# EAGLE board Qwiic_Shield_RaspberryPi-Panel (EAGLE 7.7.0)
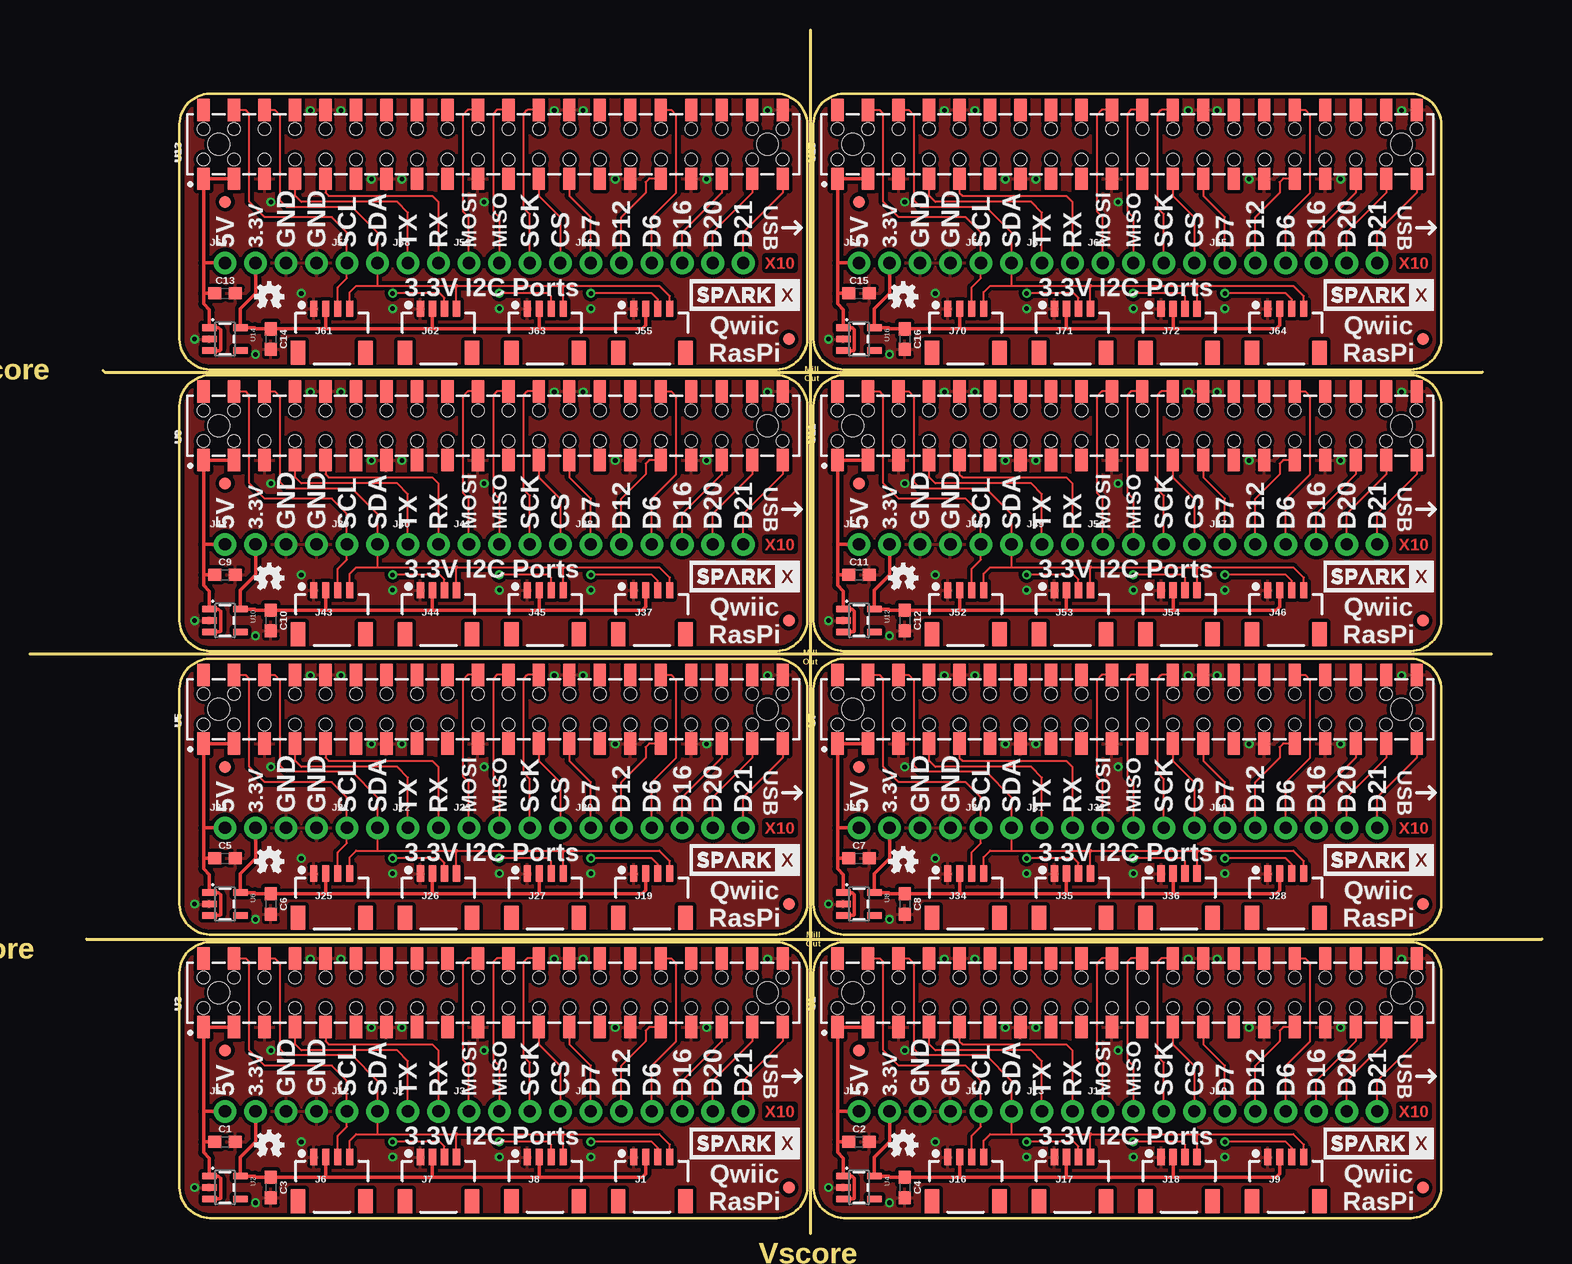
[diagram p0: board, top side]
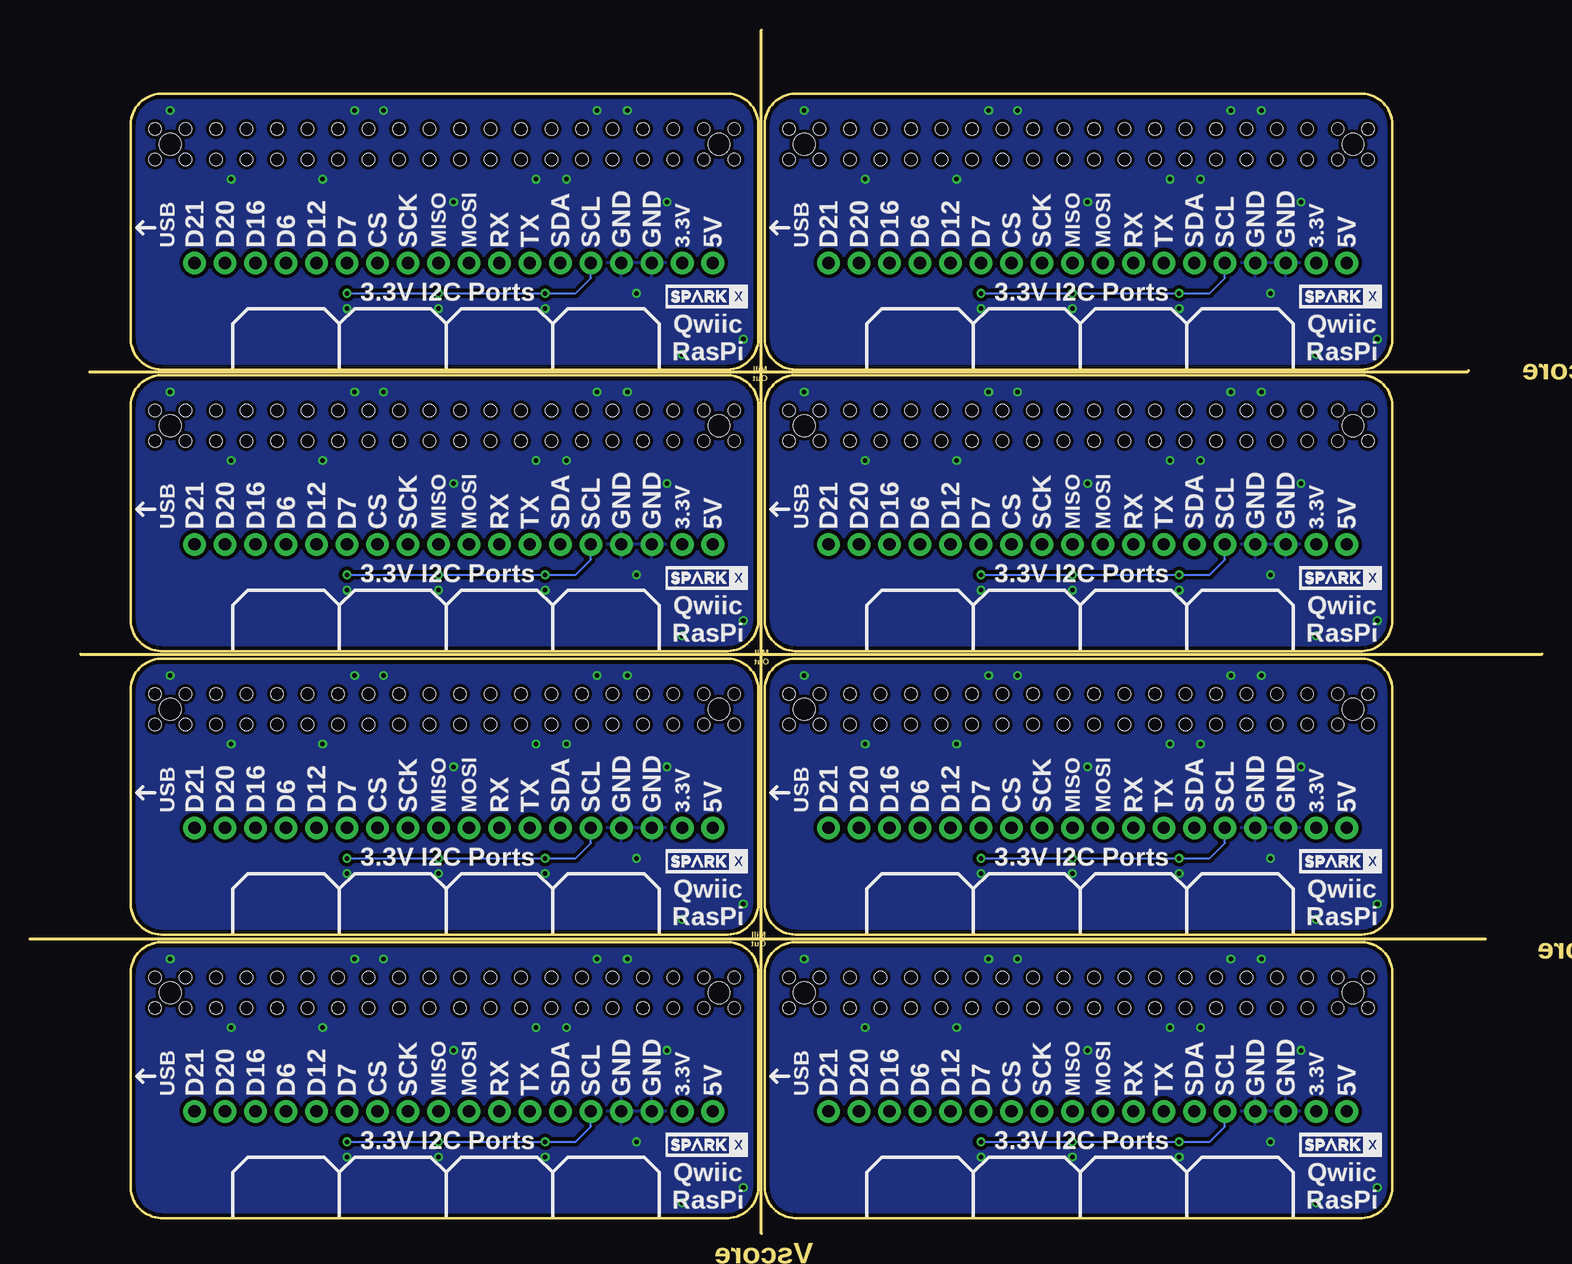
[diagram p1: board, bottom side, seen from below]

Size 125.98 x 100.3 mm. Coordinates in mm from the lower left corner, seen from the top.
Outline: 65.05,0 65.05,100.3
Outline: 6.1,71.91 6.22,71.78 121.03,71.78
Outline: 121.79,48.29 0,48.29
Outline: 4.7,24.54 125.98,24.54
Outline: 12.45,21.75 12.45,3.84 arc87 14.99,1.3 62.23,1.3 arc87 64.77,3.84 64.77,21.75 arc87 62.23,24.29 14.99,24.29 arc87 12.45,21.75
Outline: 65.28,21.75 65.28,3.84 arc87 67.82,1.3 115.06,1.3 arc87 117.6,3.84 117.6,21.75 arc87 115.06,24.29 67.82,24.29 arc87 65.28,21.75
Outline: 12.45,45.37 12.45,27.46 arc87 14.99,24.92 62.23,24.92 arc87 64.77,27.46 64.77,45.37 arc87 62.23,47.91 14.99,47.91 arc87 12.45,45.37
Outline: 65.28,45.37 65.28,27.46 arc87 67.82,24.92 115.06,24.92 arc87 117.6,27.46 117.6,45.37 arc87 115.06,47.91 67.82,47.91 arc87 65.28,45.37
Outline: 12.45,68.99 12.45,51.08 arc87 14.99,48.54 62.23,48.54 arc87 64.77,51.08 64.77,68.99 arc87 62.23,71.53 14.99,71.53 arc87 12.45,68.99
Outline: 65.28,68.99 65.28,51.08 arc87 67.82,48.54 115.06,48.54 arc87 117.6,51.08 117.6,68.99 arc87 115.06,71.53 67.82,71.53 arc87 65.28,68.99
Outline: 12.45,92.45 12.45,74.54 arc87 14.99,72 62.23,72 arc87 64.77,74.54 64.77,92.45 arc87 62.23,94.99 14.99,94.99 arc87 12.45,92.45
Outline: 65.28,92.45 65.28,74.54 arc87 67.82,72 115.06,72 arc87 117.6,74.54 117.6,92.45 arc87 115.06,94.99 67.82,94.99 arc87 65.28,92.45
Copper layers (1*16): Top 0.035mm / dielectric 1.5mm / Bottom 0.035mm
Design rules "SparkFun-2-layer-TIGHT": minimum track width 7mil, minimum drill 15mil, track to track 7mil, track to pad 7mil, pad to pad 7mil, via to via 7mil, smd to smd 7mil, copper to edge 7mil, drill to drill 7mil, minimum pad ring 7mil, minimum via ring 7mil, stop-mask expansion 4mil, vias tented up to drill 25mil, thermal gap 10mil
Net classes: 0 Default: width 0.178 mm; 1 vcc: width 0.178 mm

## Footprints (pad centres in the part's own frame; a part is rotated, then mirrored left to right if it is on the bottom)
0603 = smd 1.1 x 1: 1 -0.85,0; 2 0.85,0
FIDUCIAL-1X2 = smd 1 x 1: 1 0,0
1X04_1MM_RA = smd 0.6 x 1.35: 1 -1.5,0; 2 -0.5,0; 3 0.5,0; 4 1.5,0 | smd 1.2 x 2: NC1 2.8,-3.675; NC2 -2.8,-3.675
1X02_NO_SILK = drill 1.016 pad 1.88: 1 0,0; 2 2.54,0
1X04_NO_SILK = drill 1.016 pad 1.88: 1 0,0; 2 2.54,0; 3 5.08,0; 4 7.62,0
1X06_NO_SILK = drill 1.016 pad 1.88: 1 0,0; 2 2.54,0; 3 5.08,0; 4 7.62,0; 5 10.16,0; 6 12.7,0
RASPBERRY_PI_SHIELD_BOTTOM_ENTRY_NOHOLES = smd 1.02 x 1.87: 1 8.37,7.665; 2 8.37,1.935; 3 10.91,7.665; 4 10.91,1.935; 5 13.45,7.665; 6 13.45,1.935; 7 15.99,7.665; 8 15.99,1.935; 9 18.53,7.665; 10 18.53,1.935; 11 21.07,7.665; 12 21.07,1.935; 13 23.61,7.665; 14 23.61,1.935; 15 26.15,7.665; 16 26.15,1.935; 17 28.69,7.665; 18 28.69,1.935; 19 31.23,7.665; 20 31.23,1.935; 21 33.77,7.665; 22 33.77,1.935; 23 36.31,7.665; 24 36.31,1.935; 25 38.85,7.665; 26 38.85,1.935; 27 41.39,7.665; 28 41.39,1.935; 29 43.93,7.665; 30 43.93,1.935; 31 46.47,7.665; 32 46.47,1.935; 33 49.01,7.665; 34 49.01,1.935; 35 51.55,7.665; 36 51.55,1.935; 37 54.09,7.665; 38 54.09,1.935; 39 56.63,7.665; 40 56.63,1.935 | hole 1.02: 31.23,6.07; 31.23,3.53; 28.69,3.53; 28.69,6.07; 26.15,6.07; 26.15,3.53; 23.61,3.53; 23.61,6.07; 36.31,6.07; 36.31,3.53; 33.77,3.53; 33.77,6.07; 15.99,6.07; 15.99,3.53; 13.45,3.53; 13.45,6.07; 10.91,6.07; 10.91,3.53; 8.37,3.53; 8.37,6.07; 21.07,6.07; 21.07,3.53; 18.53,3.53; 18.53,6.07; 46.47,6.07; 46.47,3.53; 43.93,3.53; 43.93,6.07; 41.39,6.07; 41.39,3.53; 38.85,3.53; 38.85,6.07; 51.55,6.07; 51.55,3.53; 49.01,3.53; 49.01,6.07; 54.09,6.07; 56.63,6.07; 56.63,3.53; 54.09,3.53 | hole 1.8: 55.36,4.8; 9.64,4.8
SOT23-5 = smd 0.55 x 1.2: 1 -0.95,-1.3; 2 0,-1.3; 3 0.95,-1.3; 4 0.95,1.3; 5 -0.95,1.3

## Placement (x,y rotation side)
C1  1.0uF  [0603]  16.26,7.65 0 top
C2  1.0uF  [0603]  69.09,7.65 0 top
C3  1.0uF  [0603]  20.07,3.84 270 top
C4  1.0uF  [0603]  72.9,3.84 270 top
C5  1.0uF  [0603]  16.26,31.27 0 top
C6  1.0uF  [0603]  20.07,27.46 270 top
C7  1.0uF  [0603]  69.09,31.27 0 top
C8  1.0uF  [0603]  72.9,27.46 270 top
C9  1.0uF  [0603]  16.26,54.89 0 top
C10  1.0uF  [0603]  20.07,51.08 270 top
C11  1.0uF  [0603]  69.09,54.89 0 top
C12  1.0uF  [0603]  72.9,51.08 270 top
C13  1.0uF  [0603]  16.26,78.35 0 top
C14  1.0uF  [0603]  20.07,74.54 270 top
C15  1.0uF  [0603]  69.09,78.35 0 top
C16  1.0uF  [0603]  72.9,74.54 270 top
FD1  FIDUCIAL1X2  [FIDUCIAL-1X2]  16.26,15.27 180 top
FD2  FIDUCIAL1X2  [FIDUCIAL-1X2]  63.25,3.84 180 top
FD3  FIDUCIAL1X2  [FIDUCIAL-1X2]  69.09,15.27 180 top
FD4  FIDUCIAL1X2  [FIDUCIAL-1X2]  116.08,3.84 180 top
FD5  FIDUCIAL1X2  [FIDUCIAL-1X2]  16.26,38.89 180 top
FD6  FIDUCIAL1X2  [FIDUCIAL-1X2]  63.25,27.46 180 top
FD7  FIDUCIAL1X2  [FIDUCIAL-1X2]  69.09,38.89 180 top
FD8  FIDUCIAL1X2  [FIDUCIAL-1X2]  116.08,27.46 180 top
FD9  FIDUCIAL1X2  [FIDUCIAL-1X2]  16.26,62.51 180 top
FD10  FIDUCIAL1X2  [FIDUCIAL-1X2]  63.25,51.08 180 top
FD11  FIDUCIAL1X2  [FIDUCIAL-1X2]  69.09,62.51 180 top
FD12  FIDUCIAL1X2  [FIDUCIAL-1X2]  116.08,51.08 180 top
FD13  FIDUCIAL1X2  [FIDUCIAL-1X2]  16.26,85.97 180 top
FD14  FIDUCIAL1X2  [FIDUCIAL-1X2]  63.25,74.54 180 top
FD15  FIDUCIAL1X2  [FIDUCIAL-1X2]  69.09,85.97 180 top
FD16  FIDUCIAL1X2  [FIDUCIAL-1X2]  116.08,74.54 180 top
J1  [1X04_1MM_RA]  51.82,6.38 0 top
J2  [1X02_NO_SILK]  31.5,10.19 0 top
J3  [1X04_NO_SILK]  36.58,10.19 0 top
J4  [1X06_NO_SILK]  46.74,10.19 0 top
J5  [1X04_NO_SILK]  16.26,10.19 0 top
J6  [1X04_1MM_RA]  25.15,6.38 0 top
J7  [1X04_1MM_RA]  34.04,6.38 0 top
J8  [1X04_1MM_RA]  42.93,6.38 0 top
J9  [1X04_1MM_RA]  104.65,6.38 0 top
J10  [1X06_NO_SILK]  99.57,10.19 0 top
J11  [1X02_NO_SILK]  79.25,10.19 0 top
J12  [1X02_NO_SILK]  26.42,10.19 0 top
J13  [1X02_NO_SILK]  84.33,10.19 0 top
J14  [1X04_NO_SILK]  89.41,10.19 0 top
J15  [1X04_NO_SILK]  69.09,10.19 0 top
J16  [1X04_1MM_RA]  77.98,6.38 0 top
J17  [1X04_1MM_RA]  86.87,6.38 0 top
J18  [1X04_1MM_RA]  95.76,6.38 0 top
J19  [1X04_1MM_RA]  51.82,30 0 top
J20  [1X06_NO_SILK]  46.74,33.81 0 top
J21  [1X02_NO_SILK]  26.42,33.81 0 top
J22  [1X02_NO_SILK]  31.5,33.81 0 top
J23  [1X04_NO_SILK]  36.58,33.81 0 top
J24  [1X04_NO_SILK]  16.26,33.81 0 top
J25  [1X04_1MM_RA]  25.15,30 0 top
J26  [1X04_1MM_RA]  34.04,30 0 top
J27  [1X04_1MM_RA]  42.93,30 0 top
J28  [1X04_1MM_RA]  104.65,30 0 top
J29  [1X06_NO_SILK]  99.57,33.81 0 top
J30  [1X02_NO_SILK]  79.25,33.81 0 top
J31  [1X02_NO_SILK]  84.33,33.81 0 top
J32  [1X04_NO_SILK]  89.41,33.81 0 top
J33  [1X04_NO_SILK]  69.09,33.81 0 top
J34  [1X04_1MM_RA]  77.98,30 0 top
J35  [1X04_1MM_RA]  86.87,30 0 top
J36  [1X04_1MM_RA]  95.76,30 0 top
J37  [1X04_1MM_RA]  51.82,53.62 0 top
J38  [1X06_NO_SILK]  46.74,57.43 0 top
J39  [1X02_NO_SILK]  26.42,57.43 0 top
J40  [1X02_NO_SILK]  31.5,57.43 0 top
J41  [1X04_NO_SILK]  36.58,57.43 0 top
J42  [1X04_NO_SILK]  16.26,57.43 0 top
J43  [1X04_1MM_RA]  25.15,53.62 0 top
J44  [1X04_1MM_RA]  34.04,53.62 0 top
J45  [1X04_1MM_RA]  42.93,53.62 0 top
J46  [1X04_1MM_RA]  104.65,53.62 0 top
J47  [1X06_NO_SILK]  99.57,57.43 0 top
J48  [1X02_NO_SILK]  79.25,57.43 0 top
J49  [1X02_NO_SILK]  84.33,57.43 0 top
J50  [1X04_NO_SILK]  89.41,57.43 0 top
J51  [1X04_NO_SILK]  69.09,57.43 0 top
J52  [1X04_1MM_RA]  77.98,53.62 0 top
J53  [1X04_1MM_RA]  86.87,53.62 0 top
J54  [1X04_1MM_RA]  95.76,53.62 0 top
J55  [1X04_1MM_RA]  51.82,77.08 0 top
J56  [1X06_NO_SILK]  46.74,80.89 0 top
J57  [1X02_NO_SILK]  26.42,80.89 0 top
J58  [1X02_NO_SILK]  31.5,80.89 0 top
J59  [1X04_NO_SILK]  36.58,80.89 0 top
J60  [1X04_NO_SILK]  16.26,80.89 0 top
J61  [1X04_1MM_RA]  25.15,77.08 0 top
J62  [1X04_1MM_RA]  34.04,77.08 0 top
J63  [1X04_1MM_RA]  42.93,77.08 0 top
J64  [1X04_1MM_RA]  104.65,77.08 0 top
J65  [1X06_NO_SILK]  99.57,80.89 0 top
J66  [1X02_NO_SILK]  79.25,80.89 0 top
J67  [1X02_NO_SILK]  84.33,80.89 0 top
J68  [1X04_NO_SILK]  89.41,80.89 0 top
J69  [1X04_NO_SILK]  69.09,80.89 0 top
J70  [1X04_1MM_RA]  77.98,77.08 0 top
J71  [1X04_1MM_RA]  86.87,77.08 0 top
J72  [1X04_1MM_RA]  95.76,77.08 0 top
LOGO1  OSHW-LOGOMINI  [OSHW-LOGO-MINI]  19.94,7.4 0 top
LOGO2  OSHW-LOGOMINI  [OSHW-LOGO-MINI]  72.77,7.4 0 top
LOGO3  OSHW-LOGOMINI  [OSHW-LOGO-MINI]  19.94,31.02 0 top
LOGO4  OSHW-LOGOMINI  [OSHW-LOGO-MINI]  72.77,31.02 0 top
LOGO5  OSHW-LOGOMINI  [OSHW-LOGO-MINI]  19.94,54.64 0 top
LOGO6  OSHW-LOGOMINI  [OSHW-LOGO-MINI]  72.77,54.64 0 top
LOGO7  OSHW-LOGOMINI  [OSHW-LOGO-MINI]  19.94,78.1 0 top
LOGO8  OSHW-LOGOMINI  [OSHW-LOGO-MINI]  72.77,78.1 0 top
U1  RASPBERRY_PI  [RASPBERRY_PI_SHIELD_BOTTOM_ENTRY_NOHOLES]  58.93,15.27 0 top
U2  3.3V/600mA  [SOT23-5]  16.26,3.84 270 top
U3  RASPBERRY_PI  [RASPBERRY_PI_SHIELD_BOTTOM_ENTRY_NOHOLES]  6.1,15.27 0 top
U4  3.3V/600mA  [SOT23-5]  69.09,3.84 270 top
U5  RASPBERRY_PI  [RASPBERRY_PI_SHIELD_BOTTOM_ENTRY_NOHOLES]  6.1,38.89 0 top
U6  3.3V/600mA  [SOT23-5]  16.26,27.46 270 top
U7  RASPBERRY_PI  [RASPBERRY_PI_SHIELD_BOTTOM_ENTRY_NOHOLES]  58.93,38.89 0 top
U8  3.3V/600mA  [SOT23-5]  69.09,27.46 270 top
U9  RASPBERRY_PI  [RASPBERRY_PI_SHIELD_BOTTOM_ENTRY_NOHOLES]  6.1,62.51 0 top
U10  3.3V/600mA  [SOT23-5]  16.26,51.08 270 top
U11  RASPBERRY_PI  [RASPBERRY_PI_SHIELD_BOTTOM_ENTRY_NOHOLES]  58.93,62.51 0 top
U12  3.3V/600mA  [SOT23-5]  69.09,51.08 270 top
U13  RASPBERRY_PI  [RASPBERRY_PI_SHIELD_BOTTOM_ENTRY_NOHOLES]  6.1,85.97 0 top
U14  3.3V/600mA  [SOT23-5]  16.26,74.54 270 top
U15  RASPBERRY_PI  [RASPBERRY_PI_SHIELD_BOTTOM_ENTRY_NOHOLES]  58.93,85.97 0 top
U16  3.3V/600mA  [SOT23-5]  69.09,74.54 270 top
U$1  SPARKX-LOGO3  [SPARKX-SMALL]  16.76,7.4 0 bottom
U$2  SPARKX-LOGO4  [SPARKX-MEDIUM]  59.56,7.52 0 top
U$3  SPARKX-LOGO3  [SPARKX-SMALL]  69.6,7.4 0 bottom
U$4  SPARKX-LOGO4  [SPARKX-MEDIUM]  112.39,7.52 0 top
U$5  SPARKX-LOGO3  [SPARKX-SMALL]  16.76,31.02 0 bottom
U$6  SPARKX-LOGO4  [SPARKX-MEDIUM]  59.56,31.14 0 top
U$7  SPARKX-LOGO3  [SPARKX-SMALL]  69.6,31.02 0 bottom
U$8  SPARKX-LOGO4  [SPARKX-MEDIUM]  112.39,31.14 0 top
U$9  SPARKX-LOGO3  [SPARKX-SMALL]  16.76,54.64 0 bottom
U$10  SPARKX-LOGO4  [SPARKX-MEDIUM]  59.56,54.77 0 top
U$11  SPARKX-LOGO3  [SPARKX-SMALL]  69.6,54.64 0 bottom
U$12  SPARKX-LOGO4  [SPARKX-MEDIUM]  112.39,54.77 0 top
U$13  SPARKX-LOGO3  [SPARKX-SMALL]  16.76,78.1 0 bottom
U$14  SPARKX-LOGO4  [SPARKX-MEDIUM]  59.56,78.22 0 top
U$15  SPARKX-LOGO3  [SPARKX-SMALL]  69.6,78.1 0 bottom
U$16  SPARKX-LOGO4  [SPARKX-MEDIUM]  112.39,78.22 0 top

## Library data of the parts
C1-C16 = SparkFun-Capacitors; PROD_ID: CAP-00868
FD1-FD16 LOGO1-LOGO8 = SparkFun-Aesthetics
J1 J6-J9 J16-J19 J25-J28 J34-J37 J43-J46 J52-J55 J61-J64 J70-J72 U1 U3 U5 U7 U9 U11 U13 U15 U$1-U$16 = SparkX
J2 J11-J13 J21 J22 J30 J31 J39 J40 J48 J49 J57 J58 J66 J67 = SparkFun-Connectors
J3 J5 J14 J15 J23 J24 J32 J33 J41 J42 J50 J51 J59 J60 J68 J69 = SparkFun-Connectors; PROD_ID: CONN-09696
J4 J10 J20 J29 J38 J47 J56 J65 = SparkFun-Connectors; PROD_ID: CONN-08437
U2 U4 U6 U8 U10 U12 U14 U16 = SparkFun-IC-Power; PROD_ID: VREG-12457

## Nets
3.3V: C3.1 J1.2 J5.2 J6.2 J7.2 J8.2 U2.5
3.3V1: C4.1 J9.2 J15.2 J16.2 J17.2 J18.2 U4.5
3.3V2: C6.1 J19.2 J24.2 J25.2 J26.2 J27.2 U6.5
3.3V3: C8.1 J28.2 J33.2 J34.2 J35.2 J36.2 U8.5
3.3V4: C10.1 J37.2 J42.2 J43.2 J44.2 J45.2 U10.5
3.3V5: C12.1 J46.2 J51.2 J52.2 J53.2 J54.2 U12.5
3.3V6: C14.1 J55.2 J60.2 J61.2 J62.2 J63.2 U14.5
3.3V7: C16.1 J64.2 J69.2 J70.2 J71.2 J72.2 U16.5
5V: C1.1 J5.1 U2.1 U2.3 U3.2 U3.4
5V1: C2.1 J15.1 U1.2 U1.4 U4.1 U4.3
5V2: C5.1 J24.1 U5.2 U5.4 U6.1 U6.3
5V3: C7.1 J33.1 U7.2 U7.4 U8.1 U8.3
5V4: C9.1 J42.1 U9.2 U9.4 U10.1 U10.3
5V5: C11.1 J51.1 U11.2 U11.4 U12.1 U12.3
5V6: C13.1 J60.1 U13.2 U13.4 U14.1 U14.3
5V7: C15.1 J69.1 U15.2 U15.4 U16.1 U16.3
CS: J3.4 U3.24
CS1: J14.4 U1.24
CS2: J23.4 U5.24
CS3: J32.4 U7.24
CS4: J41.4 U9.24
CS5: J50.4 U11.24
CS6: J59.4 U13.24
CS7: J68.4 U15.24
D1: U1.29
D2: J10.3 U1.31
D3: J10.1 U1.26
D4: U3.7
D5: U3.29
D6: J4.3 U3.31
D7: J4.1 U3.26
D8: J10.2 U1.32
D9: U1.33
D10: J10.4 U1.36
D11: U1.11
D12: J4.2 U3.32
D13: U3.33
D14: U1.12
D15: U1.35
D16: J4.4 U3.36
D17: U3.11
D18: U3.12
D19: U3.35
D20: J4.5 U3.38
D21: J4.6 U3.40
D22: U3.15
D23: U3.16
D24: U3.18
D25: U3.22
D26: U3.37
D27: U3.13
D28: J10.5 U1.38
D29: J10.6 U1.40
D30: U1.15
D31: U1.16
D32: U1.18
D33: U1.22
D34: U1.37
D35: U1.13
D36: U1.7
D37: U5.29
D38: J20.3 U5.31
D39: J20.1 U5.26
D40: J20.2 U5.32
D41: U5.33
D42: J20.4 U5.36
D43: U5.11
D44: U5.12
D45: U5.35
D46: J20.5 U5.38
D47: J20.6 U5.40
D48: U5.15
D49: U5.16
D50: U5.18
D51: U5.22
D52: U5.37
D53: U5.13
D54: U5.7
D55: U7.29
D56: J29.3 U7.31
D57: J29.1 U7.26
D58: J29.2 U7.32
D59: U7.33
D60: J29.4 U7.36
D61: U7.11
D62: U7.12
D63: U7.35
D64: J29.5 U7.38
D65: J29.6 U7.40
D66: U7.15
D67: U7.16
D68: U7.18
D69: U7.22
D70: U7.37
D71: U7.13
D72: U7.7
D73: U9.29
D74: J38.3 U9.31
D75: J38.1 U9.26
D76: J38.2 U9.32
D77: U9.33
D78: J38.4 U9.36
D79: U9.11
D80: U9.12
D81: U9.35
D82: J38.5 U9.38
D83: J38.6 U9.40
D84: U9.15
D85: U9.16
D86: U9.18
D87: U9.22
D88: U9.37
D89: U9.13
D90: U9.7
D91: U11.29
D92: J47.3 U11.31
D93: J47.1 U11.26
D94: J47.2 U11.32
D95: U11.33
D96: J47.4 U11.36
D97: U11.11
D98: U11.12
D99: U11.35
D100: J47.5 U11.38
D101: J47.6 U11.40
D102: U11.15
D103: U11.16
D104: U11.18
D105: U11.22
D106: U11.37
D107: U11.13
D108: U11.7
D109: U13.29
D110: J56.3 U13.31
D111: J56.1 U13.26
D112: J56.2 U13.32
D113: U13.33
D114: J56.4 U13.36
D115: U13.11
D116: U13.12
D117: U13.35
D118: J56.5 U13.38
D119: J56.6 U13.40
D120: U13.15
D121: U13.16
D122: U13.18
D123: U13.22
D124: U13.37
D125: U13.13
D126: U13.7
D127: U15.29
D128: J65.3 U15.31
D129: J65.1 U15.26
D130: J65.2 U15.32
D131: U15.33
D132: J65.4 U15.36
D133: U15.11
D134: U15.12
D135: U15.35
D136: J65.5 U15.38
D137: J65.6 U15.40
D138: U15.15
D139: U15.16
D140: U15.18
D141: U15.22
D142: U15.37
D143: U15.13
D144: U15.7
GND [vcc]: C1.2 C3.2 J1.1 J5.3 J5.4 J6.1 J7.1 J8.1 U2.2 U3.6 U3.9 U3.14 U3.20 U3.25 U3.30 U3.34 U3.39
GND1 [vcc]: C2.2 C4.2 J9.1 J15.3 J15.4 J16.1 J17.1 J18.1 U1.6 U1.9 U1.14 U1.20 U1.25 U1.30 U1.34 U1.39 U4.2
GND2 [vcc]: C5.2 C6.2 J19.1 J24.3 J24.4 J25.1 J26.1 J27.1 U5.6 U5.9 U5.14 U5.20 U5.25 U5.30 U5.34 U5.39 U6.2
GND3 [vcc]: C7.2 C8.2 J28.1 J33.3 J33.4 J34.1 J35.1 J36.1 U7.6 U7.9 U7.14 U7.20 U7.25 U7.30 U7.34 U7.39 U8.2
GND4 [vcc]: C9.2 C10.2 J37.1 J42.3 J42.4 J43.1 J44.1 J45.1 U9.6 U9.9 U9.14 U9.20 U9.25 U9.30 U9.34 U9.39 U10.2
GND5 [vcc]: C11.2 C12.2 J46.1 J51.3 J51.4 J52.1 J53.1 J54.1 U11.6 U11.9 U11.14 U11.20 U11.25 U11.30 U11.34 U11.39 U12.2
GND6 [vcc]: C13.2 C14.2 J55.1 J60.3 J60.4 J61.1 J62.1 J63.1 U13.6 U13.9 U13.14 U13.20 U13.25 U13.30 U13.34 U13.39 U14.2
GND7 [vcc]: C15.2 C16.2 J64.1 J69.3 J69.4 J70.1 J71.1 J72.1 U15.6 U15.9 U15.14 U15.20 U15.25 U15.30 U15.34 U15.39 U16.2
ID_SCL: U3.28
ID_SCL1: U1.28
ID_SCL2: U5.28
ID_SCL3: U7.28
ID_SCL4: U9.28
ID_SCL5: U11.28
ID_SCL6: U13.28
ID_SCL7: U15.28
ID_SDA: U3.27
ID_SDA1: U1.27
ID_SDA2: U5.27
ID_SDA3: U7.27
ID_SDA4: U9.27
ID_SDA5: U11.27
ID_SDA6: U13.27
ID_SDA7: U15.27
MISO: J3.2 U3.21
MISO1: J14.2 U1.21
MISO2: J23.2 U5.21
MISO3: J32.2 U7.21
MISO4: J41.2 U9.21
MISO5: J50.2 U11.21
MISO6: J59.2 U13.21
MISO7: J68.2 U15.21
MOSI: J3.1 U3.19
MOSI1: J14.1 U1.19
MOSI2: J23.1 U5.19
MOSI3: J32.1 U7.19
MOSI4: J41.1 U9.19
MOSI5: J50.1 U11.19
MOSI6: J59.1 U13.19
MOSI7: J68.1 U15.19
RX: J2.2 U3.10
RX1: J13.2 U1.10
RX2: J22.2 U5.10
RX3: J31.2 U7.10
RX4: J40.2 U9.10
RX5: J49.2 U11.10
RX6: J58.2 U13.10
RX7: J67.2 U15.10
SCK: J3.3 U3.23
SCK1: J14.3 U1.23
SCK2: J23.3 U5.23
SCK3: J32.3 U7.23
SCK4: J41.3 U9.23
SCK5: J50.3 U11.23
SCK6: J59.3 U13.23
SCK7: J68.3 U15.23
SCL: J1.4 J6.4 J7.4 J8.4 J12.2 U3.5
SCL1: J9.4 J11.2 J16.4 J17.4 J18.4 U1.5
SCL2: J19.4 J21.2 J25.4 J26.4 J27.4 U5.5
SCL3: J28.4 J30.2 J34.4 J35.4 J36.4 U7.5
SCL4: J37.4 J39.2 J43.4 J44.4 J45.4 U9.5
SCL5: J46.4 J48.2 J52.4 J53.4 J54.4 U11.5
SCL6: J55.4 J57.2 J61.4 J62.4 J63.4 U13.5
SCL7: J64.4 J66.2 J70.4 J71.4 J72.4 U15.5
SDA: J1.3 J6.3 J7.3 J8.3 J12.1 U3.3
SDA1: J9.3 J11.1 J16.3 J17.3 J18.3 U1.3
SDA2: J19.3 J21.1 J25.3 J26.3 J27.3 U5.3
SDA3: J28.3 J30.1 J34.3 J35.3 J36.3 U7.3
SDA4: J37.3 J39.1 J43.3 J44.3 J45.3 U9.3
SDA5: J46.3 J48.1 J52.3 J53.3 J54.3 U11.3
SDA6: J55.3 J57.1 J61.3 J62.3 J63.3 U13.3
SDA7: J64.3 J66.1 J70.3 J71.3 J72.3 U15.3
TX: J2.1 U3.8
TX1: J13.1 U1.8
TX2: J22.1 U5.8
TX3: J31.1 U7.8
TX4: J40.1 U9.8
TX5: J49.1 U11.8
TX6: J58.1 U13.8
TX7: J67.1 U15.8

## Tracks (layer width: path | path; a pad name or v marks a point on that pad's centre or on a via)
3.3V
  Top 0.305: 24.64,4.69 C3.1 18.84,4.69 18.73,4.79 U2.5 17.53,4.82 17.53,6.38 18.8,7.65 J5.2 | 24.64,4.69 33.53,4.69 | 33.53,4.69 42.42,4.69 | 42.42,4.69 51.02,4.69 51.32,4.99 J1.2 | J8.2 42.43,4.7 42.42,4.69 | J7.2 33.54,4.7 33.53,4.69 | J6.2 24.65,4.7 24.64,4.69
3.3V1
  Top 0.305: 77.47,4.69 C4.1 71.67,4.69 71.57,4.79 U4.5 70.36,4.82 70.36,6.38 71.63,7.65 J15.2 | 77.47,4.69 86.36,4.69 | 86.36,4.69 95.25,4.69 | 95.25,4.69 103.85,4.69 104.15,4.99 J9.2 | J18.2 95.26,4.7 95.25,4.69 | J17.2 86.37,4.7 86.36,4.69 | J16.2 77.48,4.7 77.47,4.69
3.3V2
  Top 0.305: 24.64,28.31 C6.1 18.84,28.31 18.73,28.41 U6.5 17.53,28.44 17.53,30 18.8,31.27 J24.2 | 24.64,28.31 33.53,28.31 | 33.53,28.31 42.42,28.31 | 42.42,28.31 51.02,28.31 51.32,28.61 J19.2 | J27.2 42.43,28.32 42.42,28.31 | J26.2 33.54,28.32 33.53,28.31 | J25.2 24.65,28.32 24.64,28.31
3.3V3
  Top 0.305: 77.47,28.31 C8.1 71.67,28.31 71.57,28.41 U8.5 70.36,28.44 70.36,30 71.63,31.27 J33.2 | 77.47,28.31 86.36,28.31 | 86.36,28.31 95.25,28.31 | 95.25,28.31 103.85,28.31 104.15,28.61 J28.2 | J36.2 95.26,28.32 95.25,28.31 | J35.2 86.37,28.32 86.36,28.31 | J34.2 77.48,28.32 77.47,28.31
3.3V4
  Top 0.305: 24.64,51.93 C10.1 18.84,51.93 18.73,52.03 U10.5 17.53,52.06 17.53,53.62 18.8,54.89 J42.2 | 24.64,51.93 33.53,51.93 | 33.53,51.93 42.42,51.93 | 42.42,51.93 51.02,51.93 51.32,52.24 J37.2 | J45.2 42.43,51.94 42.42,51.93 | J44.2 33.54,51.94 33.53,51.93 | J43.2 24.65,51.94 24.64,51.93
3.3V5
  Top 0.305: 77.47,51.93 C12.1 71.67,51.93 71.57,52.03 U12.5 70.36,52.06 70.36,53.62 71.63,54.89 J51.2 | 77.47,51.93 86.36,51.93 | 86.36,51.93 95.25,51.93 | 95.25,51.93 103.85,51.93 104.15,52.24 J46.2 | J54.2 95.26,51.94 95.25,51.93 | J53.2 86.37,51.94 86.36,51.93 | J52.2 77.48,51.94 77.47,51.93
3.3V6
  Top 0.305: 24.64,75.39 C14.1 18.84,75.39 18.73,75.49 U14.5 17.53,75.52 17.53,77.08 18.8,78.35 J60.2 | 24.64,75.39 33.53,75.39 | 33.53,75.39 42.42,75.39 | 42.42,75.39 51.02,75.39 51.32,75.69 J55.2 | J63.2 42.43,75.4 42.42,75.39 | J62.2 33.54,75.4 33.53,75.39 | J61.2 24.65,75.4 24.64,75.39
3.3V7
  Top 0.305: 77.47,75.39 C16.1 71.67,75.39 71.57,75.49 U16.5 70.36,75.52 70.36,77.08 71.63,78.35 J69.2 | 77.47,75.39 86.36,75.39 | 86.36,75.39 95.25,75.39 | 95.25,75.39 103.85,75.39 104.15,75.69 J64.2 | J72.2 95.26,75.4 95.25,75.39 | J71.2 86.37,75.4 86.36,75.39 | J70.2 77.48,75.4 77.47,75.39
5V
  Top 0.305: 14.47,10.19 U3.2 U3.4 | 14.47,10.19 14.47,7.65 | 14.47,7.65 14.47,6.77 14.96,6.28 U2.1 15.69,4.79 15.88,4.6 15.88,2.95 15.81,2.89 U2.3 | J5.1 14.47,10.19 | C1.1 14.47,7.65
5V1
  Top 0.305: 67.3,10.19 U1.2 U1.4 | 67.3,10.19 67.3,7.65 | 67.3,7.65 67.3,6.77 67.79,6.28 U4.1 68.52,4.79 68.71,4.6 68.71,2.95 68.65,2.89 U4.3 | J15.1 67.3,10.19 | C2.1 67.3,7.65
5V2
  Top 0.305: 14.47,33.81 U5.2 U5.4 | 14.47,33.81 14.47,31.27 | 14.47,31.27 14.47,30.39 14.96,29.91 U6.1 15.69,28.41 15.88,28.22 15.88,26.57 15.81,26.51 U6.3 | J24.1 14.47,33.81 | C5.1 14.47,31.27
5V3
  Top 0.305: 67.3,33.81 U7.2 U7.4 | 67.3,33.81 67.3,31.27 | 67.3,31.27 67.3,30.39 67.79,29.91 U8.1 68.52,28.41 68.71,28.22 68.71,26.57 68.65,26.51 U8.3 | J33.1 67.3,33.81 | C7.1 67.3,31.27
5V4
  Top 0.305: 14.47,57.43 U9.2 U9.4 | 14.47,57.43 14.47,54.89 | 14.47,54.89 14.47,54.02 14.96,53.53 U10.1 15.69,52.03 15.88,51.85 15.88,50.2 15.81,50.13 U10.3 | J42.1 14.47,57.43 | C9.1 14.47,54.89
5V5
  Top 0.305: 67.3,57.43 U11.2 U11.4 | 67.3,57.43 67.3,54.89 | 67.3,54.89 67.3,54.02 67.79,53.53 U12.1 68.52,52.03 68.71,51.85 68.71,50.2 68.65,50.13 U12.3 | J51.1 67.3,57.43 | C11.1 67.3,54.89
5V6
  Top 0.305: 14.47,80.89 U13.2 U13.4 | 14.47,80.89 14.47,78.35 | 14.47,78.35 14.47,77.47 14.96,76.98 U14.1 15.69,75.49 15.88,75.3 15.88,73.65 15.81,73.59 U14.3 | J60.1 14.47,80.89 | C13.1 14.47,78.35
5V7
  Top 0.305: 67.3,80.89 U15.2 U15.4 | 67.3,80.89 67.3,78.35 | 67.3,78.35 67.3,77.47 67.79,76.98 U16.1 68.52,75.49 68.71,75.3 68.71,73.65 68.65,73.59 U16.3 | J69.1 67.3,80.89 | C15.1 67.3,78.35
CS
  Top 0.178: U3.24 42.41,15.79 44.2,14 J3.4
CS1
  Top 0.178: U1.24 95.24,15.79 97.03,14 J14.4
CS2
  Top 0.178: U5.24 42.41,39.41 44.2,37.62 J23.4
CS3
  Top 0.178: U7.24 95.24,39.41 97.03,37.62 J32.4
CS4
  Top 0.178: U9.24 42.41,63.03 44.2,61.24 J41.4
CS5
  Top 0.178: U11.24 95.24,63.03 97.03,61.24 J50.4
CS6
  Top 0.178: U13.24 42.41,86.49 44.2,84.7 J59.4
CS7
  Top 0.178: U15.24 95.24,86.49 97.03,84.7 J68.4
D2
  Top 0.178: J10.3 104.65,14 106.68,16.03 106.68,22.51 106.25,22.94 U1.31
D3
  Top 0.178: J10.1 99.57,14 97.78,15.79 U1.26
D6
  Top 0.178: J4.3 51.82,14 53.85,16.03 53.85,22.51 53.42,22.94 U3.31
D7
  Top 0.178: J4.1 46.74,14 44.95,15.79 U3.26
D8
  Top 0.178: J10.2 102.11,14 104.14,16.03 104.14,16.92 104.42,17.2 U1.32
D10
  Top 0.178: J10.4 107.19,12.73 110.48,16.02 U1.36
D12
  Top 0.178: J4.2 49.28,14 51.31,16.03 51.31,16.92 51.59,17.2 U3.32
D16
  Top 0.178: J4.4 54.36,12.73 57.65,16.02 U3.36
D20
  Top 0.178: J4.5 56.9,12.73 60.19,16.02 U3.38
D21
  Top 0.178: J4.6 59.44,12.73 62.73,16.02 U3.40
D28
  Top 0.178: J10.5 109.73,12.73 113.02,16.02 U1.38
D29
  Top 0.178: J10.6 112.27,12.73 115.56,16.02 U1.40
D38
  Top 0.178: J20.3 51.82,37.62 53.85,39.65 53.85,46.13 53.42,46.56 U5.31
D39
  Top 0.178: J20.1 46.74,37.62 44.95,39.41 U5.26
D40
  Top 0.178: J20.2 49.28,37.62 51.31,39.65 51.31,40.54 51.59,40.83 U5.32
D42
  Top 0.178: J20.4 54.36,36.35 57.65,39.64 U5.36
D46
  Top 0.178: J20.5 56.9,36.35 60.19,39.64 U5.38
D47
  Top 0.178: J20.6 59.44,36.35 62.73,39.64 U5.40
D56
  Top 0.178: J29.3 104.65,37.62 106.68,39.65 106.68,46.13 106.25,46.56 U7.31
D57
  Top 0.178: J29.1 99.57,37.62 97.78,39.41 U7.26
D58
  Top 0.178: J29.2 102.11,37.62 104.14,39.65 104.14,40.54 104.42,40.83 U7.32
D60
  Top 0.178: J29.4 107.19,36.35 110.48,39.64 U7.36
D64
  Top 0.178: J29.5 109.73,36.35 113.02,39.64 U7.38
D65
  Top 0.178: J29.6 112.27,36.35 115.56,39.64 U7.40
D74
  Top 0.178: J38.3 51.82,61.24 53.85,63.28 53.85,69.75 53.42,70.18 U9.31
D75
  Top 0.178: J38.1 46.74,61.24 44.95,63.03 U9.26
D76
  Top 0.178: J38.2 49.28,61.24 51.31,63.28 51.31,64.17 51.59,64.45 U9.32
D78
  Top 0.178: J38.4 54.36,59.97 57.65,63.26 U9.36
D82
  Top 0.178: J38.5 56.9,59.97 60.19,63.26 U9.38
D83
  Top 0.178: J38.6 59.44,59.97 62.73,63.26 U9.40
D92
  Top 0.178: J47.3 104.65,61.24 106.68,63.28 106.68,69.75 106.25,70.18 U11.31
D93
  Top 0.178: J47.1 99.57,61.24 97.78,63.03 U11.26
D94
  Top 0.178: J47.2 102.11,61.24 104.14,63.28 104.14,64.17 104.42,64.45 U11.32
D96
  Top 0.178: J47.4 107.19,59.97 110.48,63.26 U11.36
D100
  Top 0.178: J47.5 109.73,59.97 113.02,63.26 U11.38
D101
  Top 0.178: J47.6 112.27,59.97 115.56,63.26 U11.40
D110
  Top 0.178: J56.3 51.82,84.7 53.85,86.73 53.85,93.21 53.42,93.63 U13.31
D111
  Top 0.178: J56.1 46.74,84.7 44.95,86.49 U13.26
D112
  Top 0.178: J56.2 49.28,84.7 51.31,86.73 51.31,87.62 51.59,87.91 U13.32
D114
  Top 0.178: J56.4 54.36,83.43 57.65,86.72 U13.36
D118
  Top 0.178: J56.5 56.9,83.43 60.19,86.72 U13.38
D119
  Top 0.178: J56.6 59.44,83.43 62.73,86.72 U13.40
D128
  Top 0.178: J65.3 104.65,84.7 106.68,86.73 106.68,93.21 106.25,93.63 U15.31
D129
  Top 0.178: J65.1 99.57,84.7 97.78,86.49 U15.26
D130
  Top 0.178: J65.2 102.11,84.7 104.14,86.73 104.14,87.62 104.42,87.91 U15.32
D132
  Top 0.178: J65.4 107.19,83.43 110.48,86.72 U15.36
D136
  Top 0.178: J65.5 109.73,83.43 113.02,86.72 U15.38
D137
  Top 0.178: J65.6 112.27,83.43 115.56,86.72 U15.40
GND  (via drill 0.38)
  other vias: 22.61,7.65 13.72,3.84 30.23,6.38 39.12,6.38 46.74,6.38 20.07,15.27 37.85,15.27 23.37,22.89 25.91,22.89 28.45,17.18 30.99,17.18 43.69,22.89 46.1,22.89 48.77,17.18 56.39,17.18 61.47,22.89 18.8,2.57
  pour Top (isolate 0.305): 12.45,24.16 64.52,24.16 64.52,1.3 12.45,1.3
  pour Bottom (isolate 0.305): 12.45,24.16 64.52,24.16 64.52,1.3 12.45,1.3
GND1  (via drill 0.38)
  other vias: 75.44,7.65 66.55,3.84 83.06,6.38 91.95,6.38 99.57,6.38 72.9,15.27 90.68,15.27 76.2,22.89 78.74,22.89 81.28,17.18 83.82,17.18 96.52,22.89 98.93,22.89 101.6,17.18 109.22,17.18 114.3,22.89 71.63,2.57
  pour Top (isolate 0.305): 65.28,24.16 117.35,24.16 117.35,1.3 65.28,1.3
  pour Bottom (isolate 0.305): 65.28,24.16 117.35,24.16 117.35,1.3 65.28,1.3
GND2  (via drill 0.38)
  other vias: 22.61,31.27 13.72,27.46 30.23,30 39.12,30 46.74,30 20.07,38.89 37.85,38.89 23.37,46.51 25.91,46.51 28.45,40.8 30.99,40.8 43.69,46.51 46.1,46.51 48.77,40.8 56.39,40.8 61.47,46.51 18.8,26.19
  pour Top (isolate 0.305): 12.45,47.78 64.52,47.78 64.52,24.92 12.45,24.92
  pour Bottom (isolate 0.305): 12.45,47.78 64.52,47.78 64.52,24.92 12.45,24.92
GND3  (via drill 0.38)
  other vias: 75.44,31.27 66.55,27.46 83.06,30 91.95,30 99.57,30 72.9,38.89 90.68,38.89 76.2,46.51 78.74,46.51 81.28,40.8 83.82,40.8 96.52,46.51 98.93,46.51 101.6,40.8 109.22,40.8 114.3,46.51 71.63,26.19
  pour Top (isolate 0.305): 65.28,47.78 117.35,47.78 117.35,24.92 65.28,24.92
  pour Bottom (isolate 0.305): 65.28,47.78 117.35,47.78 117.35,24.92 65.28,24.92
GND4  (via drill 0.38)
  other vias: 22.61,54.89 13.72,51.08 30.23,53.62 39.12,53.62 46.74,53.62 20.07,62.51 37.85,62.51 23.37,70.13 25.91,70.13 28.45,64.42 30.99,64.42 43.69,70.13 46.1,70.13 48.77,64.42 56.39,64.42 61.47,70.13 18.8,49.81
  pour Top (isolate 0.305): 12.45,71.4 64.52,71.4 64.52,48.54 12.45,48.54
  pour Bottom (isolate 0.305): 12.45,71.4 64.52,71.4 64.52,48.54 12.45,48.54
GND5  (via drill 0.38)
  other vias: 75.44,54.89 66.55,51.08 83.06,53.62 91.95,53.62 99.57,53.62 72.9,62.51 90.68,62.51 76.2,70.13 78.74,70.13 81.28,64.42 83.82,64.42 96.52,70.13 98.93,70.13 101.6,64.42 109.22,64.42 114.3,70.13 71.63,49.81
  pour Top (isolate 0.305): 65.28,71.4 117.35,71.4 117.35,48.54 65.28,48.54
  pour Bottom (isolate 0.305): 65.28,71.4 117.35,71.4 117.35,48.54 65.28,48.54
GND6  (via drill 0.38)
  other vias: 22.61,78.35 13.72,74.54 30.23,77.08 39.12,77.08 46.74,77.08 20.07,85.97 37.85,85.97 23.37,93.59 25.91,93.59 28.45,87.88 30.99,87.88 43.69,93.59 46.1,93.59 48.77,87.88 56.39,87.88 61.47,93.59 18.8,73.27
  pour Top (isolate 0.305): 12.45,94.86 64.52,94.86 64.52,72 12.45,72
  pour Bottom (isolate 0.305): 12.45,94.86 64.52,94.86 64.52,72 12.45,72
GND7  (via drill 0.38)
  other vias: 75.44,78.35 66.55,74.54 83.06,77.08 91.95,77.08 99.57,77.08 72.9,85.97 90.68,85.97 76.2,93.59 78.74,93.59 81.28,87.88 83.82,87.88 96.52,93.59 98.93,93.59 101.6,87.88 109.22,87.88 114.3,93.59 71.63,73.27
  pour Top (isolate 0.305): 65.28,94.86 117.35,94.86 117.35,72 65.28,72
  pour Bottom (isolate 0.305): 65.28,94.86 117.35,94.86 117.35,72 65.28,72
MISO
  Top 0.178: U3.21 38.91,22.94 38.61,22.64 38.61,14.51 39.12,14 J3.2
MISO1
  Top 0.178: U1.21 91.74,22.94 91.44,22.64 91.44,14.51 91.95,14 J14.2
MISO2
  Top 0.178: U5.21 38.91,46.56 38.61,46.26 38.61,38.13 39.12,37.62 J23.2
MISO3
  Top 0.178: U7.21 91.74,46.56 91.44,46.26 91.44,38.13 91.95,37.62 J32.2
MISO4
  Top 0.178: U9.21 38.91,70.18 38.61,69.88 38.61,61.75 39.12,61.24 J41.2
MISO5
  Top 0.178: U11.21 91.74,70.18 91.44,69.88 91.44,61.75 91.95,61.24 J50.2
MISO6
  Top 0.178: U13.21 38.91,93.63 38.61,93.34 38.61,85.21 39.12,84.7 J59.2
MISO7
  Top 0.178: U15.21 91.74,93.63 91.44,93.34 91.44,85.21 91.95,84.7 J68.2
MOSI
  Top 0.178: J3.1 36.58,14 36.07,14.51 36.07,22.51 36.49,22.94 U3.19
MOSI1
  Top 0.178: J14.1 89.41,14 88.9,14.51 88.9,22.51 89.33,22.94 U1.19
MOSI2
  Top 0.178: J23.1 36.58,37.62 36.07,38.13 36.07,46.13 36.49,46.56 U5.19
MOSI3
  Top 0.178: J32.1 89.41,37.62 88.9,38.13 88.9,46.13 89.33,46.56 U7.19
MOSI4
  Top 0.178: J41.1 36.58,61.24 36.07,61.75 36.07,69.75 36.49,70.18 U9.19
MOSI5
  Top 0.178: J50.1 89.41,61.24 88.9,61.75 88.9,69.75 89.33,70.18 U11.19
MOSI6
  Top 0.178: J59.1 36.58,84.7 36.07,85.21 36.07,93.21 36.49,93.63 U13.19
MOSI7
  Top 0.178: J68.1 89.41,84.7 88.9,85.21 88.9,93.21 89.33,93.63 U15.19
RX
  Top 0.178: U3.10 24.63,16.04 24.89,15.78 33.53,15.78 34.04,15.27 J2.2
RX1
  Top 0.178: U1.10 77.46,16.04 77.72,15.78 86.36,15.78 86.87,15.27 J13.2
RX2
  Top 0.178: U5.10 24.63,39.67 24.89,39.4 33.53,39.4 34.04,38.89 J22.2
RX3
  Top 0.178: U7.10 77.46,39.67 77.72,39.4 86.36,39.4 86.87,38.89 J31.2
RX4
  Top 0.178: U9.10 24.63,63.29 24.89,63.02 33.53,63.02 34.04,62.51 J40.2
RX5
  Top 0.178: U11.10 77.46,63.29 77.72,63.02 86.36,63.02 86.87,62.51 J49.2
RX6
  Top 0.178: U13.10 24.63,86.74 24.89,86.48 33.53,86.48 34.04,85.97 J58.2
RX7
  Top 0.178: U15.10 77.46,86.74 77.72,86.48 86.36,86.48 86.87,85.97 J67.2
SCK
  Top 0.178: J3.3 41.66,14.25 41.15,14.76 41.15,22.64 41.45,22.94 U3.23
SCK1
  Top 0.178: J14.3 94.49,14.25 93.98,14.76 93.98,22.64 94.28,22.94 U1.23
SCK2
  Top 0.178: J23.3 41.66,37.88 41.15,38.38 41.15,46.26 41.45,46.56 U5.23
SCK3
  Top 0.178: J32.3 94.49,37.88 93.98,38.38 93.98,46.26 94.28,46.56 U7.23
SCK4
  Top 0.178: J41.3 41.66,61.5 41.15,62.01 41.15,69.88 41.45,70.18 U9.23
SCK5
  Top 0.178: J50.3 94.49,61.5 93.98,62.01 93.98,69.88 94.28,70.18 U11.23
SCK6
  Top 0.178: J59.3 41.66,84.95 41.15,85.46 41.15,93.34 41.45,93.63 U13.23
SCK7
  Top 0.178: J68.3 94.49,84.95 93.98,85.46 93.98,93.34 94.28,93.63 U15.23
SCL
  Top 0.178: J6.4 26.65,7.75 27.18,8.29 28.96,8.29 | 28.96,8.29 35.56,8.29 44.45,8.29 52.45,8.29 53.32,7.42 J1.4 | J8.4 44.43,8.26 | J7.4 35.54,8.26 | 28.96,8.29 J12.2 28.96,12.73 26.8,14.89 21.34,14.89 20.83,15.4 20.83,22.51 20.4,22.94 U3.5
  Top 0.305: 44.43,8.26 44.45,8.29 | 35.54,8.26 35.56,8.29
SCL1
  Top 0.178: J16.4 79.48,7.75 80.01,8.29 81.79,8.29 | 81.79,8.29 88.39,8.29 97.28,8.29 105.28,8.29 106.15,7.42 J9.4 | J18.4 97.26,8.26 | J17.4 88.37,8.26 | 81.79,8.29 J11.2 81.79,12.73 79.63,14.89 74.17,14.89 73.66,15.4 73.66,22.51 73.23,22.94 U1.5
  Top 0.305: 97.26,8.26 97.28,8.29 | 88.37,8.26 88.39,8.29
SCL2
  Top 0.178: J25.4 26.65,31.38 27.18,31.91 28.96,31.91 | 28.96,31.91 35.56,31.91 44.45,31.91 52.45,31.91 53.32,31.04 J19.4 | J27.4 44.43,31.88 | J26.4 35.54,31.88 | 28.96,31.91 J21.2 28.96,36.35 26.8,38.51 21.34,38.51 20.83,39.02 20.83,46.13 20.4,46.56 U5.5
  Top 0.305: 44.43,31.88 44.45,31.91 | 35.54,31.88 35.56,31.91
SCL3
  Top 0.178: J34.4 79.48,31.38 80.01,31.91 81.79,31.91 | 81.79,31.91 88.39,31.91 97.28,31.91 105.28,31.91 106.15,31.04 J28.4 | J36.4 97.26,31.88 | J35.4 88.37,31.88 | 81.79,31.91 J30.2 81.79,36.35 79.63,38.51 74.17,38.51 73.66,39.02 73.66,46.13 73.23,46.56 U7.5
  Top 0.305: 97.26,31.88 97.28,31.91 | 88.37,31.88 88.39,31.91
SCL4
  Top 0.178: J43.4 26.65,55 27.18,55.53 28.96,55.53 | 28.96,55.53 35.56,55.53 44.45,55.53 52.45,55.53 53.32,54.66 J37.4 | J45.4 44.43,55.5 | J44.4 35.54,55.5 | 28.96,55.53 J39.2 28.96,59.97 26.8,62.13 21.34,62.13 20.83,62.64 20.83,69.75 20.4,70.18 U9.5
  Top 0.305: 44.43,55.5 44.45,55.53 | 35.54,55.5 35.56,55.53
SCL5
  Top 0.178: J52.4 79.48,55 80.01,55.53 81.79,55.53 | 81.79,55.53 88.39,55.53 97.28,55.53 105.28,55.53 106.15,54.66 J46.4 | J54.4 97.26,55.5 | J53.4 88.37,55.5 | 81.79,55.53 J48.2 81.79,59.97 79.63,62.13 74.17,62.13 73.66,62.64 73.66,69.75 73.23,70.18 U11.5
  Top 0.305: 97.26,55.5 97.28,55.53 | 88.37,55.5 88.39,55.53
SCL6
  Top 0.178: J61.4 26.65,78.45 27.18,78.98 28.96,78.98 | 28.96,78.98 35.56,78.98 44.45,78.98 52.45,78.98 53.32,78.12 J55.4 | J63.4 44.43,78.96 | J62.4 35.54,78.96 | 28.96,78.98 J57.2 28.96,83.43 26.8,85.59 21.34,85.59 20.83,86.1 20.83,93.21 20.4,93.63 U13.5
  Top 0.305: 44.43,78.96 44.45,78.98 | 35.54,78.96 35.56,78.98
SCL7
  Top 0.178: J70.4 79.48,78.45 80.01,78.98 81.79,78.98 | 81.79,78.98 88.39,78.98 97.28,78.98 105.28,78.98 106.15,78.12 J64.4 | J72.4 97.26,78.96 | J71.4 88.37,78.96 | 81.79,78.98 J66.2 81.79,83.43 79.63,85.59 74.17,85.59 73.66,86.1 73.66,93.21 73.23,93.63 U15.5
  Top 0.305: 97.26,78.96 97.28,78.98 | 88.37,78.96 88.39,78.98
SDA  (via drill 0.38)
  Top 0.178: J6.3 25.65,8.15 26.42,8.92 J12.1 26.42,12.73 25.15,14 19.56,14 18.29,15.27 18.29,22.64 17.99,22.94 U3.3 | J1.3 52.32,7.15 51.82,7.65 v46.74,7.65 | J7.3 34.54,7.28 34.16,7.65 v30.23,7.65 | J8.3 43.43,7.4 43.18,7.65 v39.12,7.65
  Bottom 0.178: v46.74,7.65 v39.12,7.65 v30.23,7.65 27.69,7.65 26.42,8.92 J12.1
SDA1  (via drill 0.38)
  Top 0.178: J16.3 78.48,8.15 79.25,8.92 J11.1 79.25,12.73 77.98,14 72.39,14 71.12,15.27 71.12,22.64 70.82,22.94 U1.3 | J9.3 105.15,7.15 104.65,7.65 v99.57,7.65 | J17.3 87.37,7.28 87,7.65 v83.06,7.65 | J18.3 96.26,7.4 96.01,7.65 v91.95,7.65
  Bottom 0.178: v99.57,7.65 v91.95,7.65 v83.06,7.65 80.52,7.65 79.25,8.92 J11.1
SDA2  (via drill 0.38)
  Top 0.178: J25.3 25.65,31.77 26.42,32.54 J21.1 26.42,36.35 25.15,37.62 19.56,37.62 18.29,38.89 18.29,46.26 17.99,46.56 U5.3 | J19.3 52.32,30.77 51.82,31.27 v46.74,31.27 | J26.3 34.54,30.9 34.16,31.27 v30.23,31.27 | J27.3 43.43,31.03 43.18,31.27 v39.12,31.27
  Bottom 0.178: v46.74,31.27 v39.12,31.27 v30.23,31.27 27.69,31.27 26.42,32.54 J21.1
SDA3  (via drill 0.38)
  Top 0.178: J34.3 78.48,31.77 79.25,32.54 J30.1 79.25,36.35 77.98,37.62 72.39,37.62 71.12,38.89 71.12,46.26 70.82,46.56 U7.3 | J28.3 105.15,30.77 104.65,31.27 v99.57,31.27 | J35.3 87.37,30.9 87,31.27 v83.06,31.27 | J36.3 96.26,31.03 96.01,31.27 v91.95,31.27
  Bottom 0.178: v99.57,31.27 v91.95,31.27 v83.06,31.27 80.52,31.27 79.25,32.54 J30.1
SDA4  (via drill 0.38)
  Top 0.178: J43.3 25.65,55.39 26.42,56.16 J39.1 26.42,59.97 25.15,61.24 19.56,61.24 18.29,62.51 18.29,69.88 17.99,70.18 U9.3 | J37.3 52.32,54.39 51.82,54.89 v46.74,54.89 | J44.3 34.54,54.52 34.16,54.89 v30.23,54.89 | J45.3 43.43,54.65 43.18,54.89 v39.12,54.89
  Bottom 0.178: v46.74,54.89 v39.12,54.89 v30.23,54.89 27.69,54.89 26.42,56.16 J39.1
SDA5  (via drill 0.38)
  Top 0.178: J52.3 78.48,55.39 79.25,56.16 J48.1 79.25,59.97 77.98,61.24 72.39,61.24 71.12,62.51 71.12,69.88 70.82,70.18 U11.3 | J46.3 105.15,54.39 104.65,54.89 v99.57,54.89 | J53.3 87.37,54.52 87,54.89 v83.06,54.89 | J54.3 96.26,54.65 96.01,54.89 v91.95,54.89
  Bottom 0.178: v99.57,54.89 v91.95,54.89 v83.06,54.89 80.52,54.89 79.25,56.16 J48.1
SDA6  (via drill 0.38)
  Top 0.178: J61.3 25.65,78.85 26.42,79.62 J57.1 26.42,83.43 25.15,84.7 19.56,84.7 18.29,85.97 18.29,93.34 17.99,93.63 U13.3 | J55.3 52.32,77.85 51.82,78.35 v46.74,78.35 | J62.3 34.54,77.98 34.16,78.35 v30.23,78.35 | J63.3 43.43,78.1 43.18,78.35 v39.12,78.35
  Bottom 0.178: v46.74,78.35 v39.12,78.35 v30.23,78.35 27.69,78.35 26.42,79.62 J57.1
SDA7  (via drill 0.38)
  Top 0.178: J70.3 78.48,78.85 79.25,79.62 J66.1 79.25,83.43 77.98,84.7 72.39,84.7 71.12,85.97 71.12,93.34 70.82,93.63 U15.3 | J64.3 105.15,77.85 104.65,78.35 v99.57,78.35 | J71.3 87.37,77.98 87,78.35 v83.06,78.35 | J72.3 96.26,78.1 96.01,78.35 v91.95,78.35
  Bottom 0.178: v99.57,78.35 v91.95,78.35 v83.06,78.35 80.52,78.35 79.25,79.62 J66.1
TX
  Top 0.178: J2.1 31.5,14.38 30.61,15.27 22.61,15.27 22.1,15.78 22.1,17.19 U3.8
TX1
  Top 0.178: J13.1 84.33,14.38 83.44,15.27 75.44,15.27 74.93,15.78 74.93,17.19 U1.8
TX2
  Top 0.178: J22.1 31.5,38 30.61,38.89 22.61,38.89 22.1,39.4 22.1,40.81 U5.8
TX3
  Top 0.178: J31.1 84.33,38 83.44,38.89 75.44,38.89 74.93,39.4 74.93,40.81 U7.8
TX4
  Top 0.178: J40.1 31.5,61.62 30.61,62.51 22.61,62.51 22.1,63.02 22.1,64.44 U9.8
TX5
  Top 0.178: J49.1 84.33,61.62 83.44,62.51 75.44,62.51 74.93,63.02 74.93,64.44 U11.8
TX6
  Top 0.178: J58.1 31.5,85.08 30.61,85.97 22.61,85.97 22.1,86.48 22.1,87.89 U13.8
TX7
  Top 0.178: J67.1 84.33,85.08 83.44,85.97 75.44,85.97 74.93,86.48 74.93,87.89 U15.8

## Text on the board
Top: X10 | X10 | X10 | X10 | X10 | X10 | X10 | X10
Dimension: Vscore | Mill / Out | Vscore | Mill / Out | Mill / Out | Vscore | Vscore
tPlace: USB | USB | 5V | 3.3V | GND | GND | SCL | SDA | TX | RX | MOSI | MISO | SCK | CS | D7 | D12 | D6 | D16 | D20 | D21 | 5V | 3.3V | GND | GND | SCL | SDA | TX | RX | MOSI | MISO | SCK | CS | D7 | D12 | D6 | D16 | D20 | D21 | 3.3V I2C Ports | 3.3V I2C Ports | Qwiic / RasPi | Qwiic / RasPi | USB | USB | 5V | 3.3V | GND | GND | SCL | SDA | TX | RX | MOSI | MISO | SCK | CS | D7 | D12 | D6 | D16 | D20 | D21 | 5V | 3.3V | GND | GND | SCL | SDA | TX | RX | MOSI | MISO | SCK | CS | D7 | D12 | D6 | D16 | D20 | D21 | 3.3V I2C Ports | 3.3V I2C Ports | Qwiic / RasPi | Qwiic / RasPi | USB | USB | 5V | 3.3V | GND | GND | SCL | SDA | TX | RX | MOSI | MISO | SCK | CS | D7 | D12 | D6 | D16 | D20 | D21 | 5V | 3.3V | GND | GND | SCL | SDA | TX | RX | MOSI | MISO | SCK | CS | D7 | D12 | D6 | D16 | D20 | D21 | 3.3V I2C Ports | 3.3V I2C Ports | Qwiic / RasPi | Qwiic / RasPi | USB | USB | 5V | 3.3V | GND | GND | SCL | SDA | TX | RX | MOSI | MISO | SCK | CS | D7 | D12 | D6 | D16 | D20 | D21 | 5V | 3.3V | GND | GND | SCL | SDA | TX | RX | MOSI | MISO | SCK | CS | D7 | D12 | D6 | D16 | D20 | D21 | 3.3V I2C Ports | 3.3V I2C Ports | Qwiic / RasPi | Qwiic / RasPi
bPlace: USB | USB | 5V | 3.3V | GND | GND | SCL | SDA | TX | RX | MOSI | MISO | SCK | CS | D7 | D12 | D6 | D16 | D20 | D21 | 5V | 3.3V | GND | GND | SCL | SDA | TX | RX | MOSI | MISO | SCK | CS | D7 | D12 | D6 | D16 | D20 | D21 | 3.3V I2C Ports | 3.3V I2C Ports | Qwiic / RasPi | Qwiic / RasPi | USB | USB | 5V | 3.3V | GND | GND | SCL | SDA | TX | RX | MOSI | MISO | SCK | CS | D7 | D12 | D6 | D16 | D20 | D21 | 5V | 3.3V | GND | GND | SCL | SDA | TX | RX | MOSI | MISO | SCK | CS | D7 | D12 | D6 | D16 | D20 | D21 | 3.3V I2C Ports | 3.3V I2C Ports | Qwiic / RasPi | Qwiic / RasPi | USB | USB | 5V | 3.3V | GND | GND | SCL | SDA | TX | RX | MOSI | MISO | SCK | CS | D7 | D12 | D6 | D16 | D20 | D21 | 5V | 3.3V | GND | GND | SCL | SDA | TX | RX | MOSI | MISO | SCK | CS | D7 | D12 | D6 | D16 | D20 | D21 | 3.3V I2C Ports | 3.3V I2C Ports | Qwiic / RasPi | Qwiic / RasPi | USB | USB | 5V | 3.3V | GND | GND | SCL | SDA | TX | RX | MOSI | MISO | SCK | CS | D7 | D12 | D6 | D16 | D20 | D21 | 5V | 3.3V | GND | GND | SCL | SDA | TX | RX | MOSI | MISO | SCK | CS | D7 | D12 | D6 | D16 | D20 | D21 | 3.3V I2C Ports | 3.3V I2C Ports | Qwiic / RasPi | Qwiic / RasPi